# Altium PCB EMGnew.PcbDoc
Units mm, origin at the board's own origin, x right, y up, seen from the top; angles counter-clockwise.
Board outline 60.25 x 62 mm, 2 copper layers (Top Layer, Bottom Layer), stack 1.6 mm thick; 30 components, 19 nets, 123 pads, 11 vias.
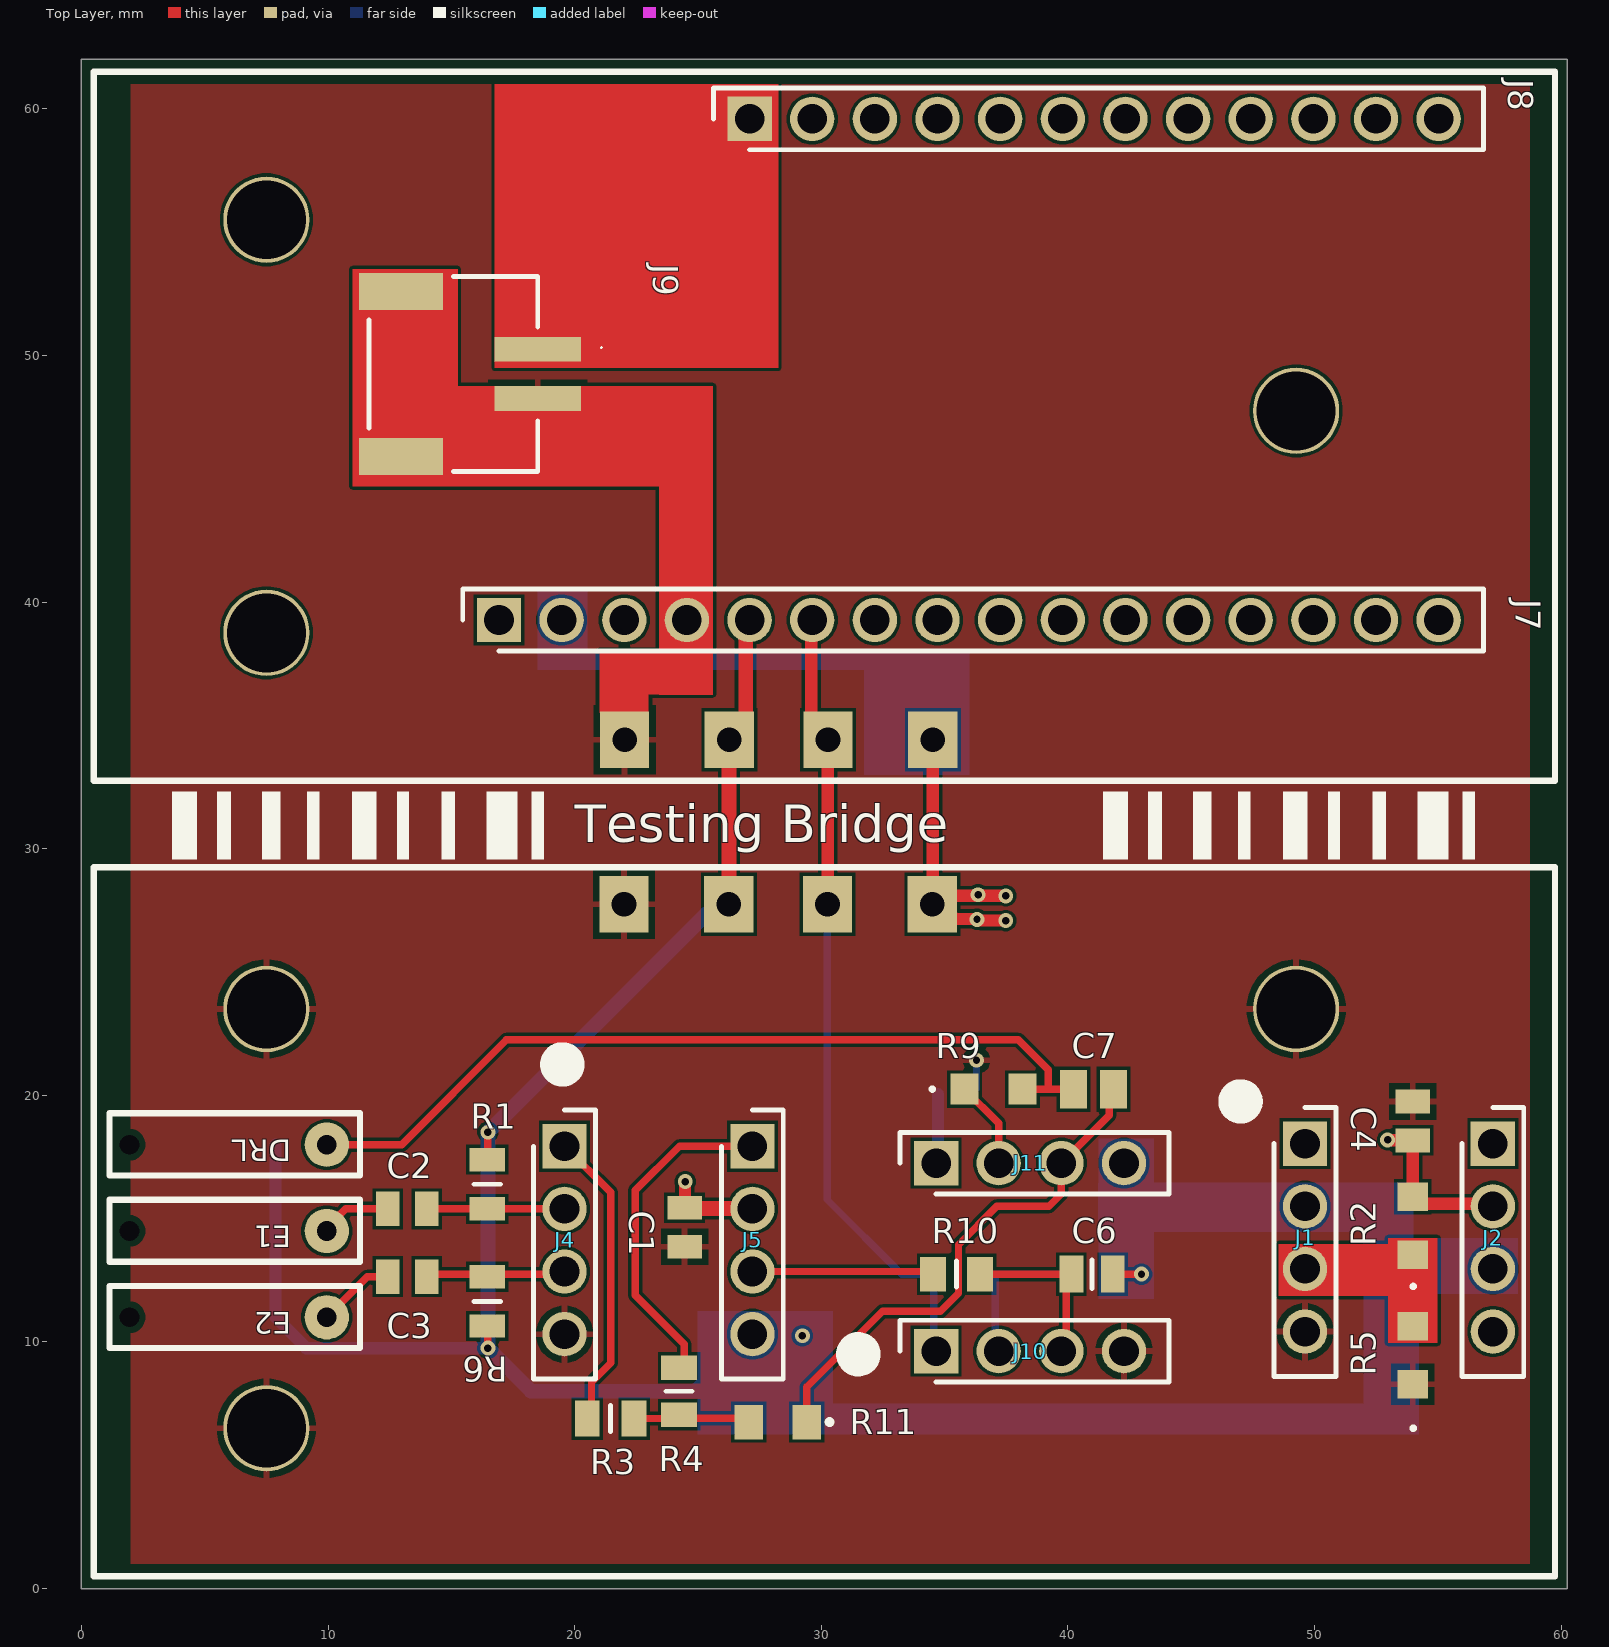
[diagram p0: Top Layer view]
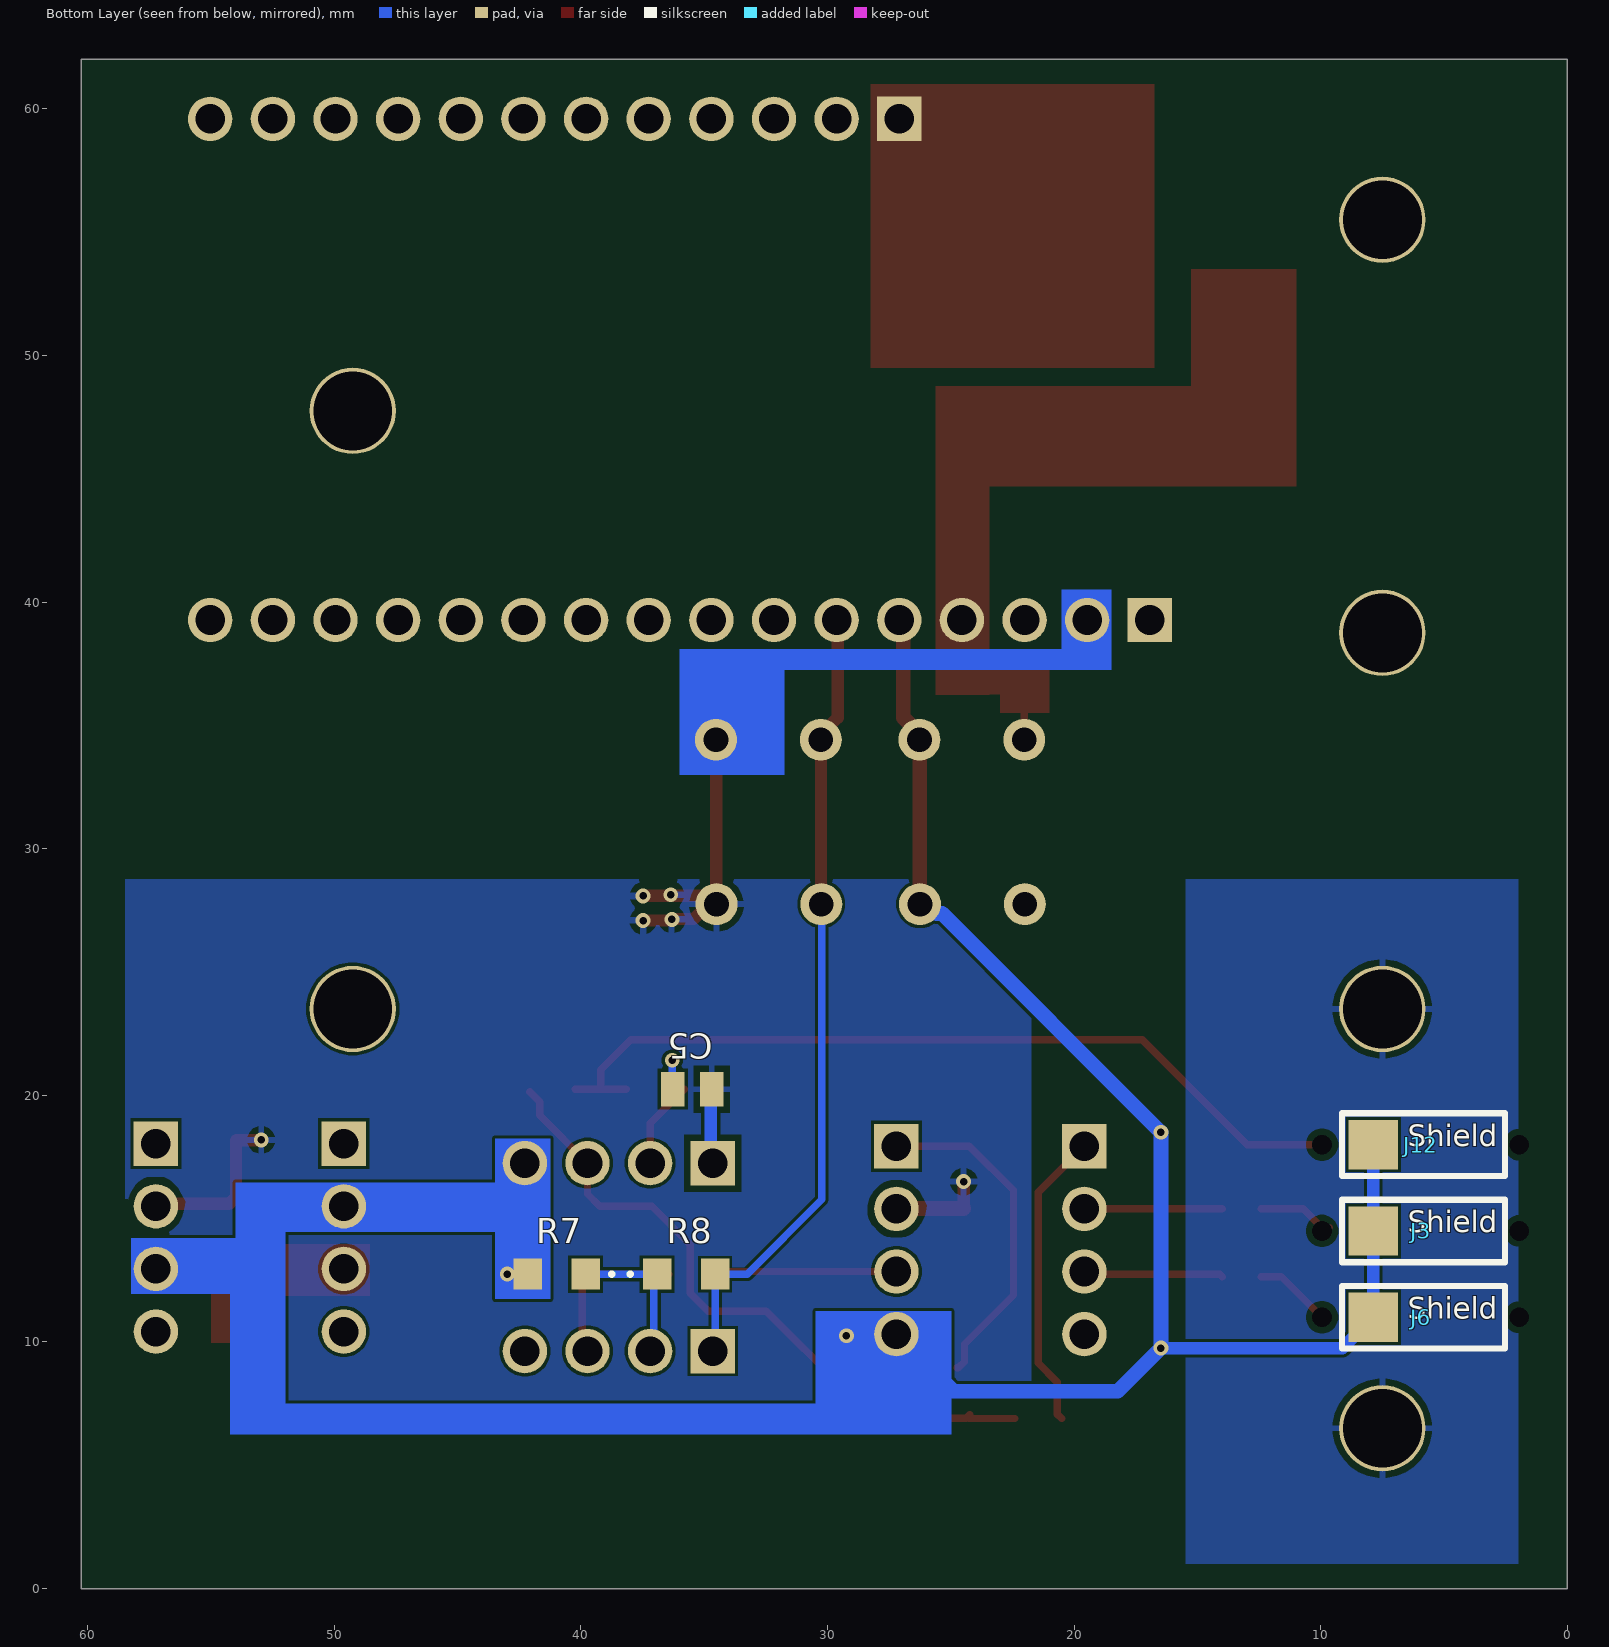
[diagram p1: Bottom Layer view, seen from below]
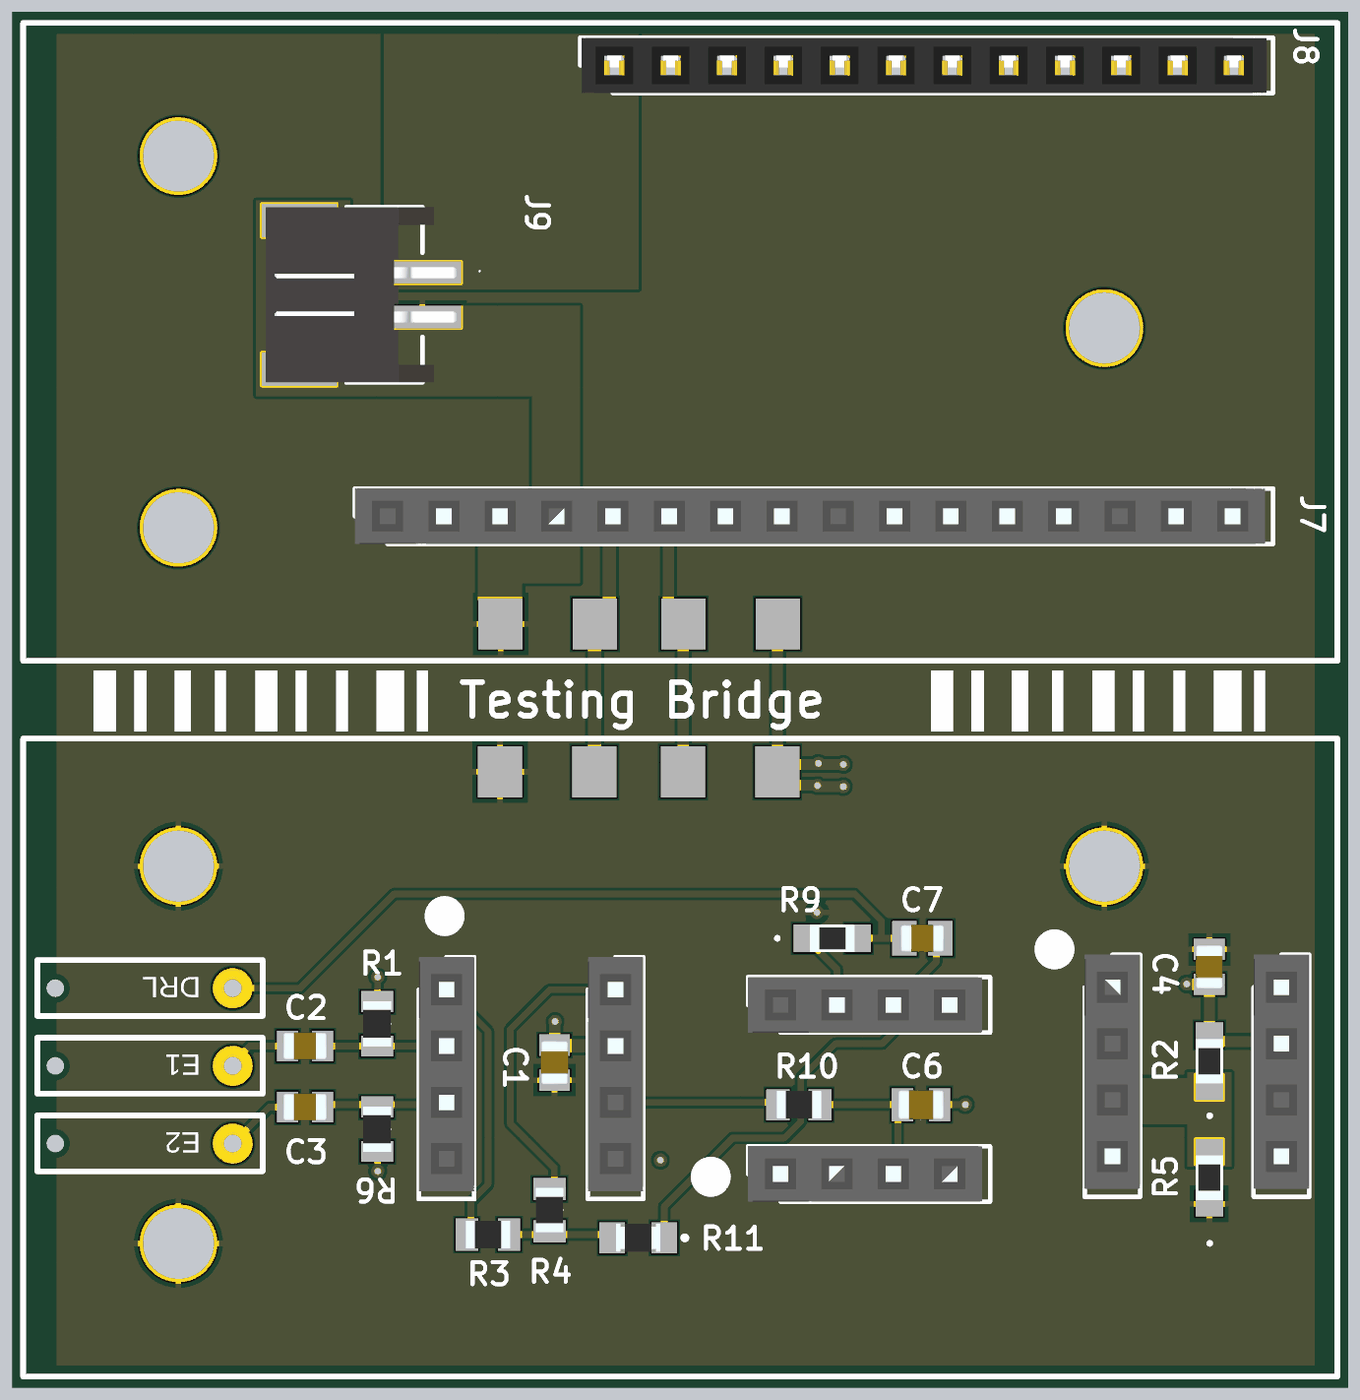
[diagram p2: 3D render of the assembled board from above, using the file's embedded part models]
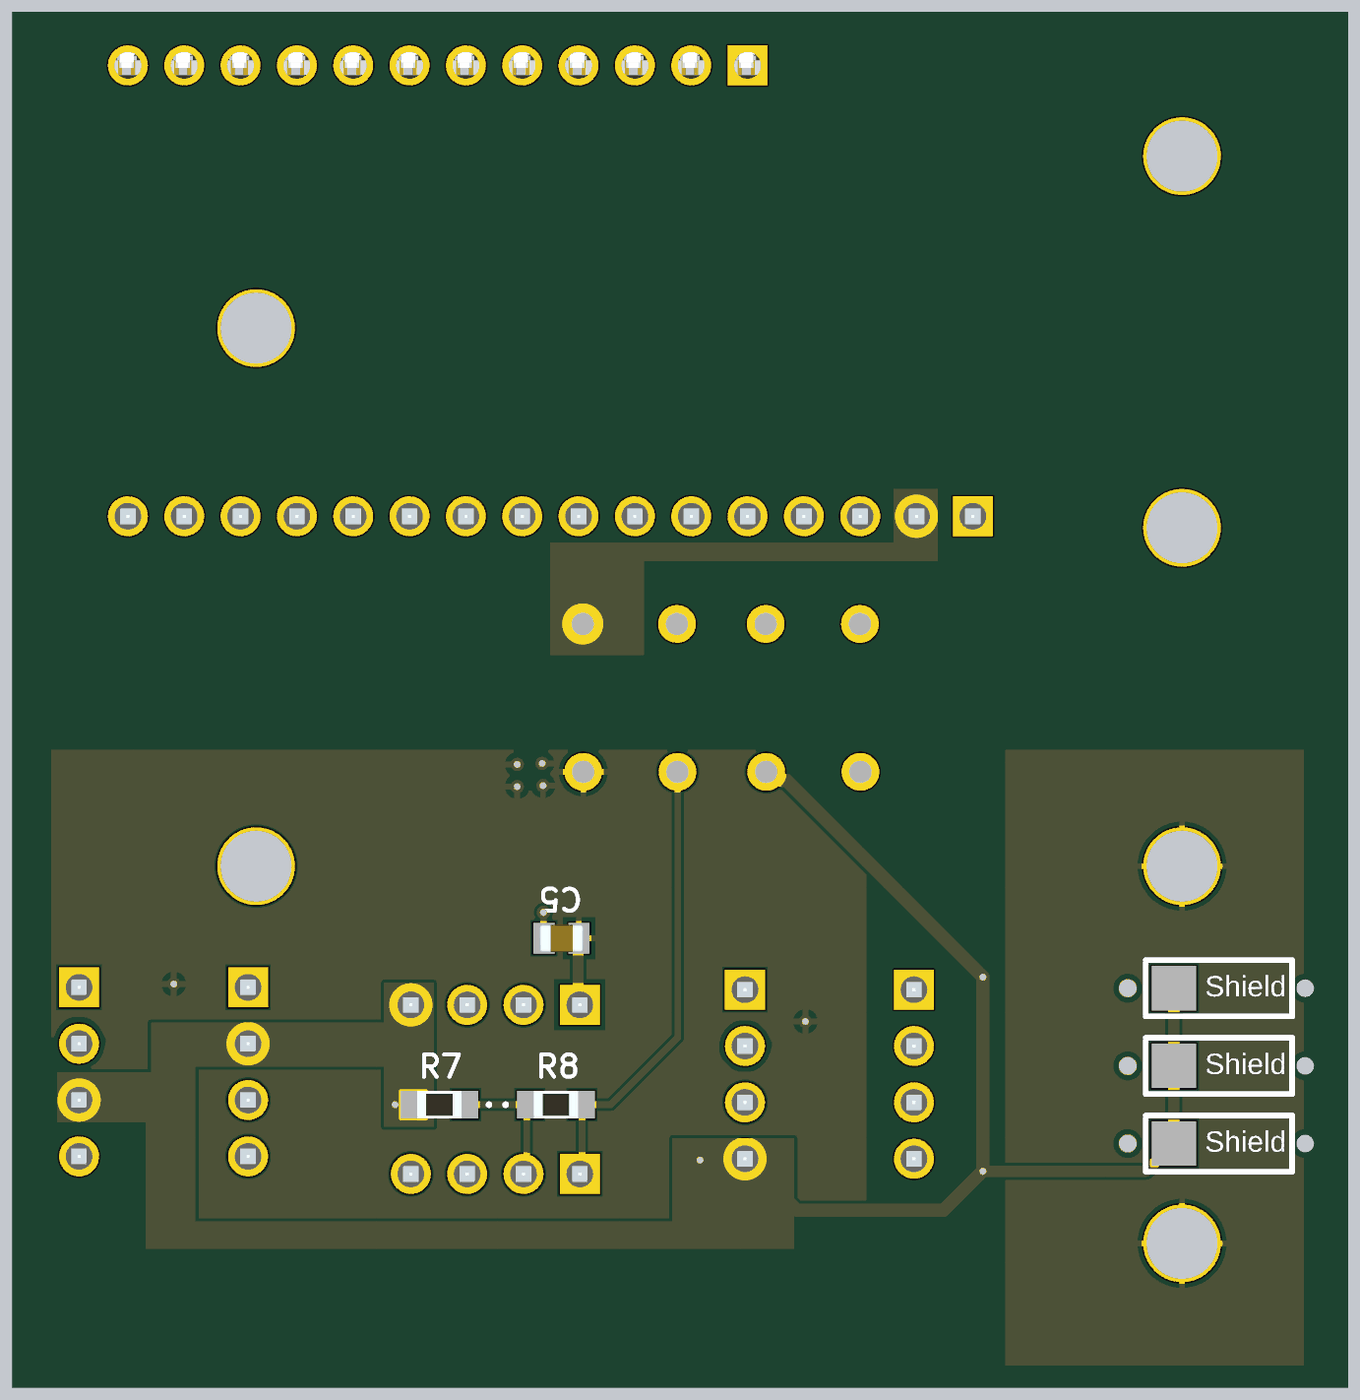
[diagram p3: 3D render of the assembled board from below, using the file's embedded part models]

## Layer stack, top to bottom
Top Solder: solder mask 0.0203, Solder Resist, Dk 3.5
Top Layer: signal copper 0.0508
Dielectric 1: dielectric 1.4986, FR-4, Dk 4.8
Bottom Layer: signal copper 0.0508
Bottom Solder: solder mask 0.0203, Solder Resist, Dk 3.5

## Board outline
0,0 0,62 60.25,62 60.25,0

## Design rules (kind name [scope] priority, off if disabled: settings)
BoardOutlineClearance [All] p1: gap=0.2 ignorepadtopadclearanceinfootprint=FALSE
Clearance [All] p1: gap=0.127 ignorepadtopadclearanceinfootprint=FALSE except(0.25: Arc-Hole Track-Hole SMDPad-Hole THPad-Hole Via-Hole Fill-Hole Poly-Hole Region-Hole Text-Hole)
ComponentClearance [All] p1: gap=0.127 collisioncheckmode=3 verticalgap=0.127 showdistances=TRUE
DiffPairsRouting [All] p1: maxlimit=0.254 minlimit=0.127 mostfreqgap=0.127 toplayer_minwidth=0.127 toplayer_maxwidth=25.4 toplayer_prefwidth=0.127 bottomlayer_minwidth=0.127 bottomlayer_maxwidth=25.4 bottomlayer_prefwidth=0.127 maxuncoupledlength=12.7
Height [All] p1: minheight=0 maxheight=1816.048 prefheight=12.7
HoleSize [All] p1: absolutevalues=TRUE maxlimit=6.3 minlimit=0.3 maxpercent=80.000 minpercent=20.000
HoleToHoleClearance [All] p1: gap=0.25 allowstackedmicrovias=FALSE
MinimumAnnularRing [All] p1: minimumring=0.076
MinimumSolderMaskSliver [All] p1: minsoldermaskwidth=0
PlaneClearance [All] p1: clearance=0.127
PlaneConnect PlaneConnectPowerPads [InPadClass('PowerPads')] p1: planeconnectstyle=Direct reliefexpansion=0.508 reliefentries=4 reliefconductorwidth=0.254 reliefairgap=0.254
PlaneConnect [All] p2: pad.planeconnectstyle=Relief pad.reliefexpansion=0.3 pad.reliefentries=4 pad.reliefconductorwidth=0.127 pad.reliefairgap=0.127 via.planeconnectstyle=Direct via.reliefexpansion=0.3 via.reliefentries=4 via.reliefconductorwidth=0.127 via.reliefairgap=0.127
PolygonConnect PolygonConnect_4 [All vs IsNamedPolygon('NONET_L-01_P-001')] p1: connectstyle=Relief reliefconductorwidth=0.254 reliefentries=4 polygonreliefangle="90 Angle" airgapwidth=0.254
PolygonConnect PolygonConnect_3 [All vs IsNamedPolygon('NONET_L-01_P-001')] p2: thpad.connectstyle=NoConnect thpad.reliefconductorwidth=0.254 thpad.reliefentries=4 thpad.polygonreliefangle="90 Angle" thpad.airgapwidth=0.254 smdpad.connectstyle=Relief smdpad.reliefconductorwidth=0.254 smdpad.reliefentries=4 smdpad.polygonreliefangle="90 Angle" smdpad.airgapwidth=0.254 via.connectstyle=Relief via.reliefconductorwidth=0.254 via.reliefentries=4 via.polygonreliefangle="90 Angle" via.airgapwidth=0.254
PolygonConnect PolygonConnect_2 [All vs IsNamedPolygon('NONET_L-01_P-001')] p3: connectstyle=Relief reliefconductorwidth=0.254 reliefentries=4 polygonreliefangle="90 Angle" airgapwidth=0.254
PolygonConnect PolygonConnect_1 [All vs IsNamedPolygon('NONET_L-01_P-001')] p4: thpad.connectstyle=NoConnect thpad.reliefconductorwidth=0.254 thpad.reliefentries=4 thpad.polygonreliefangle="90 Angle" thpad.airgapwidth=0.254 smdpad.connectstyle=Relief smdpad.reliefconductorwidth=0.254 smdpad.reliefentries=4 smdpad.polygonreliefangle="90 Angle" smdpad.airgapwidth=0.254 via.connectstyle=Relief via.reliefconductorwidth=0.3 via.reliefentries=4 via.polygonreliefangle="90 Angle" via.airgapwidth=0.254
PolygonConnect PolygonConnectPowerPads [All vs (InPadClass('PowerPads'))] p5: connectstyle=Direct reliefconductorwidth=0.254 reliefentries=4 polygonreliefangle="90 Angle" airgapwidth=0.254
PolygonConnect [All] p6: thpad.connectstyle=Relief thpad.reliefconductorwidth=0.127 thpad.reliefentries=4 thpad.polygonreliefangle="90 Angle" thpad.airgapwidth=0.127 smdpad.connectstyle=Relief smdpad.reliefconductorwidth=0.127 smdpad.reliefentries=4 smdpad.polygonreliefangle="90 Angle" smdpad.airgapwidth=0.127 via.connectstyle=Direct via.reliefconductorwidth=0.127 via.reliefentries=4 via.polygonreliefangle="90 Angle" via.airgapwidth=0.127
RoutingVias [All] p1: holewidth=0.3 width=0.6 viastyle="Through Hole" minholewidth=0.3 minwidth=0.6 maxholewidth=0.6 maxwidth=6.6
SilkToSilkClearance [All] p1: silktosilkclearance=0
SilkToSolderMaskClearance [IsPad] p1: minsilkscreentomaskgap=0.127 clearancetoexposedcopper=TRUE
SolderMaskExpansion [All] p1: expansion=0.075 istentingtop=FALSE
SupplyNets "Schematic Supply Nets_2" [InNet('SGND')] p1: voltage=0.000
SupplyNets "Schematic Supply Nets_1" [InNet('GND')] p2: voltage=0.000
SupplyNets "Schematic Supply Nets" [InNet('3V3')] p3: voltage=0.000
Width [All] p1: maxlimit=25.4 minlimit=0.127 preferedwidth=0.127 minimp=50.000000 maximp=50.000000 favimp=50.000000
20 further rules are at their usual default settings.

## Components (designator, comment, footprint, x,y, rotation, side; value= is the part's Value field where it differs from the comment)
C1 "10u" CAPC2012X135N 24.457,14.644 r270 top
C2 "10u" CAPC2012X135N 13.207,15.394 r0 top
C3 "10u" CAPC2012X135N 13.207,12.644 r0 top
C4 "10u" CAPC2012X135N 53.982,18.959 r90 top
C5 "10u" CAPC2012X135N 35.482,20.249 r0 bottom
C6 "4.7u" CAPC2114X145N 40.982,12.749 r0 top
C7 "1nF" CAPC2012X140N 41.042,20.249 r180 top
J1 "M20-7820446" RHDR4W70P0X254_1X4_1056X250X865P 49.612,18.039 r270 top
J2 "M20-7820446" RHDR4W70P0X254_1X4_1056X250X865P 57.232,18.039 r270 top
J3 "shielded_connector" coaxial_connector 7.232,14.499 r180 top
J4 "M20-7820446" RHDR4W70P0X254_1X4_1056X250X865P 19.587,17.934 r270 top
J5 "M20-7820446" RHDR4W70P0X254_1X4_1056X250X865P 27.207,17.934 r270 top
J6 "shielded_connector" coaxial_connector 7.232,10.999 r180 top
J7 "M20-7821642" RHDR16W70P0X254_1X16_4104X250X865P 16.93,39.27 r0 top
J8 "M20-7821242" RHDR12W70P0X254_1X12_3088X250X865P 27.09,59.59 r0 top
J9 "1769" 1769 18.5,49.25 r270 top
J10 "M20-7820446" RHDR4W70P0X254_1X4_1056X250X865P 34.652,9.629 r0 top
J11 "M20-7820446" RHDR4W70P0X254_1X4_1056X250X865P 34.652,17.249 r0 top
J12 "shielded_connector" coaxial_connector 7.232,17.999 r180 top
R1 "15K" RESC2013X84N 16.457,16.394 r90 top
R2 "1M" ERJUP6 53.982,14.709 r90 top
R3 "1K" RESC2012X60N 21.457,6.894 r0 top
R4 "1K" RESC2012X60N 24.232,7.999 r90 top
R5 "1M" ERJUP6 53.982,9.459 r90 top
R6 "15K" RESC2013X84N 16.457,11.644 r90 top
R7 "4.3K" ERJUP6 40.982,12.749 r0 bottom
R8 "10K" ERJUP6 35.732,12.749 r180 bottom
R9 "100K" ERJUP6 36.982,20.249 r0 top
R10 "100R" RESC2012X70N 35.482,12.749 r0 top
R11 "15K" ERJP06D1000V 28.232,6.749 r180 top

## Footprints (in the part's own frame and the unit in brackets; to place one, negate y for a bottom-side part, rotate by r counter-clockwise, add the part's x,y. Pads: shape width x height; smd on the part's side, far side on the other; paste and mask are expansions set on the pad)
1769 [mm]
  rect 1x3.5 smd: 1(-1,0) 2(1,0)
  rect 1.5x3.4 smd: 3(-3.35,-5.55) 4(3.35,-5.55)
  silkscreen extent -3.95,-6.85 3.95,2.61, body extent -3.95,-7.07 3.95,1.53, height 4.8
CAPC2012X135N [mm]
  rect 0.96x1.39 smd: 1(-0.79,0) 2(0.79,0)
  body extent -1,-0.63 1,0.63, height 1.35
CAPC2012X140N [mm]
  rect 1.1x1.57 smd: 1(-0.81,0) 2(0.81,0)
  body extent -1,-0.63 1,0.63, height 1.4
CAPC2114X145N [mm]
  rect 0.96x1.49 smd: 1(-0.84,0) 2(0.84,0)
  silkscreen extent 0,-0.58 0,0.58, body extent -1.05,-0.67 1.05,0.67, height 1.45
coaxial_connector [mm]
  round 1.8 / inner round 2 / far side round 0 hole 0.8: 1(-2.715,0)
  rect 2x2 smd far side: 2(-0.635,0)
  round 0.475 hole 0.8 unplated: 3(5.285,0)
  silkscreen extent -4.06,-1.27 6.1,1.25
ERJP06D1000V [mm]
  rect 1.15x1.4 smd: 1(-1.175,0) 2(1.175,0)
  silkscreen extent -2.2,-0.1 -2,0.1, body extent -1,-0.63 1,0.63, height 0.6
ERJUP6 [mm]
  rect 1.15x1.25 smd: 1(-1.175,0) 2(1.175,0)
  silkscreen extent -2.51,-0.07 -2.41,0.03, body extent -1,-0.63 1,0.63, height 0.6
RESC2012X60N [mm]
  rect 1x1.45 smd: 1(-0.95,0) 2(0.95,0)
  silkscreen extent 0,-0.53 0,0.53, body extent -1,-0.63 1,0.63, height 0.6
RESC2012X70N [mm]
  rect 1.05x1.4 smd: 1(-0.95,0) 2(0.95,0)
  silkscreen extent 0,-0.53 0,0.53, body extent -1,-0.63 1,0.63, height 0.6
RESC2013X84N [mm]
  rect 0.95x1.45 smd: 1(-1,0) 2(1,0)
  silkscreen extent 0,-0.54 0,0.54, body extent -1.02,-0.64 1.02,0.64, height 0.84
RHDR4W70P0X254_1X4_1056X250X865P [mm]
  rect 1.8x1.8 hole 1.2: 1(0,0)
  round 1.8 hole 1.2: 2(2.54,0) 3(5.08,0) 4(7.62,0)
  silkscreen extent -1.47,-1.25 9.44,1.25, body extent -1.47,-1.25 9.09,1.25, height 8.65
RHDR12W70P0X254_1X12_3088X250X865P [mm]
  rect 1.8x1.8 hole 1.2: 1(0,0)
  round 1.8 hole 1.2: 2(2.54,0) 3(5.08,0) 4(7.62,0) 5(10.16,0) 6(12.7,0) 7(15.24,0) 8(17.78,0) 9(20.32,0) 10(22.86,0) 11(25.4,0) 12(27.94,0)
  silkscreen extent -1.47,-1.25 29.76,1.25, body extent -1.41,-1.25 29.47,1.25, height 8.5
RHDR16W70P0X254_1X16_4104X250X865P [mm]
  rect 1.8x1.8 hole 1.2: 1(0,0)
  round 1.8 hole 1.2: 2(2.54,0) 3(5.08,0) 4(7.62,0) 5(10.16,0) 6(12.7,0) 7(15.24,0) 8(17.78,0) 9(20.32,0) 10(22.86,0) 11(25.4,0) 12(27.94,0) 13(30.48,0) 14(33.02,0) 15(35.56,0) 16(38.1,0)
  silkscreen extent -1.47,-1.25 39.92,1.25, body extent -1.47,-1.25 39.57,1.25, height 8.65

## Part data
C1 C2 C3 C4 C5: library part EMK212BB7106KG-T, "Capacitor", Manufacturer_Name="TAIYO YUDEN", Mouser Part Number=963-EMK212BB7106KG-T, Datasheet Link=https://www.mouser.com/ds/2/396/mlcc11_hq_e-541564.pdf, Height=1.35mm, Manufacturer_Part_Number=EMK212BB7106KG-T, Mouser Price/Stock=https://www.mouser.co.uk/ProductDetail/TAIYO-YUDEN/EMK212BB7106KG-T?qs=vF%252B8ahGVilemLVRka0hELA%3D%3D
C6: library part MCASE21GBC7475KTCA01, "Capacitor", Manufacturer_Name="TAIYO YUDEN", Datasheet Link=https://www.mouser.com/datasheet/2/396/TAIYO_YUDEN_03_04_2025_MCASE21GBC7475KTCA01_SS-3571538.pdf, Height=1.45mm, Manufacturer_Part_Number=MCASE21GBC7475KTCA01
C7: library part C0805X102MBRAC3316, "Capacitor", Manufacturer_Name=KEMET, Mouser Part Number=80-C0805X102MBR3316, Datasheet Link=https://search.kemet.com/component-documentation/download/specsheet/C0805X102MBRAC3316, Height=1.4mm, Manufacturer_Part_Number=C0805X102MBRAC3316, Mouser Price/Stock=https://www.mouser.co.uk/ProductDetail/KEMET/C0805X102MBRAC3316?qs=1Kr7Jg1SGW%252B2hGpng33iKA%3D%3D
J1 J2 J4 J5 J10 J11: "Connector", Manufacturer_Name=Harwin, Mouser Part Number=855-M20-7820446, Datasheet Link=https://cdn.harwin.com/pdfs/M20-782.pdf, Height=8.65mm, Manufacturer_Part_Number=M20-7820446, Mouser Price/Stock=https://www.mouser.co.uk/ProductDetail/Harwin/M20-7820446?qs=vF78I%252BjhbY8%252Bno0H8mp9XA%3D%3D
J7: "Connector", Manufacturer_Name=Harwin, Mouser Part Number=855-M20-7821642, Datasheet Link=https://cdn.harwin.com/pdfs/M20-782.pdf, Height=8.65mm, Manufacturer_Part_Number=M20-7821642, Mouser Price/Stock=https://www.mouser.co.uk/ProductDetail/Harwin/M20-7821642?qs=ulE8k0yEMYYHOwsI6S7TGA%3D%3D
J8: "Connector", Manufacturer_Name=Harwin, Mouser Part Number=855-M20-7821242, Datasheet Link=https://cdn.harwin.com/pdfs/M20-782.pdf, Height=8.65mm, Manufacturer_Part_Number=M20-7821242, Mouser Price/Stock=https://www.mouser.co.uk/ProductDetail/Harwin/M20-7821242?qs=ulE8k0yEMYZ9a6Cl8vr1ng%3D%3D
J9: "Connector", Manufacturer_Name=Adafruit, Mouser Part Number=485-1769, Arrow Part Number=1769, Arrow Price/Stock=https://www.arrow.com/en/products/1769/adafruit-industries?utm_currency=USD&region=nac, Datasheet Link=https://cdn-shop.adafruit.com/datasheets/17311.pdf, Height=5.5mm, Manufacturer_Part_Number=1769, Mouser Price/Stock=https://www.mouser.co.uk/ProductDetail/Adafruit/1769?qs=GURawfaeGuBbgoGtf2XstA%3D%3D
R1 R6: library part PLTT0805Z1502QGT5, "Resistor", Manufacturer_Name=Vishay, Mouser Part Number=71-PLTT0805Z1502QGT5, Datasheet Link=https://www.vishay.com/docs/60082/pltt.pdf, Height=0.838mm, Manufacturer_Part_Number=PLTT0805Z1502QGT5, Mouser Price/Stock=https://www.mouser.co.uk/ProductDetail/Vishay-Thin-Film/PLTT0805Z1502QGT5?qs=QmnkJ35t3fjZaQs5uMld%252Bg%3D%3D
R2 R5: library part ERJ-UP6D1004V, "Resistor", Manufacturer_Name=Panasonic, Datasheet Link=https://industrial.panasonic.com/cdbs/www-data/pdf/RDP0000/AOA0000C337.pdf, Height=0.7mm, Manufacturer_Part_Number=ERJ-UP6D1004V
R3 R4: library part CRCW08051K00FKTAHP, "Resistor", Manufacturer_Name=Vishay, Datasheet Link=https://componentsearchengine.com/Datasheets/1/CRCW08051R00FKEAHP.pdf, Height=0.6mm, Manufacturer_Part_Number=CRCW08051K00FKTAHP
R7: library part ERJ-UP6D4301V, "Resistor", Manufacturer_Name=Panasonic, Mouser Part Number=667-ERJ-UP6D4301V, Arrow Part Number=ERJ-UP6D4301V, Arrow Price/Stock=https://www.arrow.com/en/products/erj-up6d4301v/panasonic?region=nac, Datasheet Link=https://industrial.panasonic.com/cdbs/www-data/pdf/RDP0000/AOA0000C337.pdf, Height=0.7mm, Manufacturer_Part_Number=ERJ-UP6D4301V, Mouser Price/Stock=https://www.mouser.co.uk/ProductDetail/Panasonic/ERJ-UP6D4301V?qs=ZcfC38r4PouG4jhBxte63A%3D%3D
R8: library part ERJ-UP6D1002V, "Resistor", Manufacturer_Name=Panasonic, Datasheet Link=https://industrial.panasonic.com/cdbs/www-data/pdf/RDP0000/AOA0000C337.pdf, Height=0.7mm, Manufacturer_Part_Number=ERJ-UP6D1002V
R9: library part ERJ-UP6D1003V, "Resistor", Manufacturer_Name=Panasonic, Datasheet Link=https://industrial.panasonic.com/cdbs/www-data/pdf/RDP0000/AOA0000C337.pdf, Height=0.7mm, Manufacturer_Part_Number=ERJ-UP6D1003V
R10: library part ERJ-S06J101V, "Resistor", Manufacturer_Name=Panasonic, Mouser Part Number=667-ERJ-S06J101V, Datasheet Link=https://industrial.panasonic.com/cdbs/www-data/pdf/RDP0000/AOA0000C334.pdf, Height=0.7mm, Manufacturer_Part_Number=ERJ-S06J101V, Mouser Price/Stock=https://www.mouser.co.uk/ProductDetail/Panasonic/ERJ-S06J101V?qs=Zyl8A9hlmJqshrwxn1wW6g%3D%3D
R11: library part ERJ-P06D1502V, "Resistor", Manufacturer_Name=Panasonic, Mouser Part Number=667-ERJ-P06D1502V, Datasheet Link=http://industrial.panasonic.com/cdbs/www-data/pdf/RDA0000/AOA0000C102.pdf, Height=0.7mm, Manufacturer_Part_Number=ERJ-P06D1502V, Mouser Price/Stock=https://www.mouser.com/Search/Refine.aspx?Keyword=667-ERJ-P06D1502V

## Free pads (board coordinates)
  round 3.5 hole 3.2: 4(7.5,6.5) 4(7.5,23.5) 4(7.5,38.75) 4(7.5,55.5) 4(49.25,23.5) 4(49.25,47.75)
  round 1.7 hole 1: 5(22,27.75) 5(22.022,34.415) 5(26.25,27.75) 5(26.272,34.415) 5(30.25,27.75) 5(30.272,34.415) 5(34.5,27.75) 5(34.522,34.415)
  rect 2x2.3 smd: 6(22,27.75) 6(22.022,34.415) 6(26.25,27.75) 6(26.272,34.415) 6(30.25,27.75) 6(30.272,34.415) 6(34.5,27.75) 6(34.522,34.415)

## Via types
v1: diameter 0.6, hole 0.3, Top Layer to Bottom Layer, tented both sides, 11 vias

## Nets (pads, with @x,y where several pads share a name; then routed paths per layer and width w, separated by ;. In a path a pad name is that pad's centre, name@x,y a point inside that pad or via, vN(x,y) a via of type N, cw(c..) or ccw(c..) an arc to the next point about the centre after c; other vN are vias at no path point)
3V3: C1.1 C4.1 C5.1 J2.2 J5.2 J7.2 J11.1 pad.5@34.5,27.75 pad.5@34.522,34.415 pad.6@34.5,27.75 pad.6@34.522,34.415 R2.2 | length 26.8
  Top Layer w0.5: C1.1@24.477,15.414 24.469,15.421 24.469,16.486 v1(24.482,16.499) ; J5.2@27.187,15.414 J5.2 ; pad.6@34.522,34.415 34.511,34.404 34.511,27.761 pad.6@34.5,27.75 ; v1(37.478,27.085) 36.428,27.085 36.401,27.112 36.33,27.112 36.292,27.15 35.425,27.15 34.825,27.75 pad.6@34.5,27.75 ; v1(37.478,28.085) 34.5,28.085 pad.6@34.5,27.75 ; v1(52.961,18.189) 52.972,18.179 53.972,18.179 C4.1 R2.2 54.27,15.596 57.135,15.596 J2.2
  Top Layer w0.6: C1.1@24.477,15.414 J5.2@27.187,15.414
  Bottom Layer w0.5: J11.1@34.732,17.053 C5.1@34.732,20.053
  other v1: 36.311,27.131 36.355,28.132
A1: J7.6 J10.1 pad.5@30.25,27.75 pad.5@30.272,34.415 pad.6@30.25,27.75 pad.6@30.272,34.415 R8.2 | length 32.6
  Top Layer w0.5: J7.6 29.591,39.231 29.591,35.308 30.272,34.627 30.272,34.415 30.261,34.404 30.261,27.761 pad.6@30.25,27.75
  Bottom Layer w0.3: pad.5@30.25,27.75 30.232,27.75 30.232,15.773 33.256,12.749 R8.2 34.557,9.724 J10.1
BAT: J8.1 J9.1
DRL_sense: R3.2 R4.1 R11.2 | length 4.8
  Top Layer w0.3: R3.2 R4.1@24.257,6.894 ; R4.1 24.382,6.899 26.907,6.899 R11.2
GND: C1.2 C4.2 C5.2 J1.4 J4.4 J7.4 J9.2 J9.3 J9.4 J10.4 pad.4@7.5,6.5 pad.4@7.5,23.5 pad.4@49.25,23.5 pad.5@22,27.75 pad.5@22.022,34.415 pad.6@22,27.75 pad.6@22.022,34.415 R5.1 | length 3.5
  Top Layer w0.3: pad.6@22,27.75 pad.6@22.011,27.761 ; pad.6@22.011,34.404 22.022,34.415 22.022,36.742
  Bottom Layer w0.3: C5.2 36.291,20.268 v1(36.291,21.418)
INA_out: J5.3 R10.1 | length 7.4
  Top Layer w0.3: J5.3 34.427,12.854 R10.1
NetC2_1: C2.1 J3.1 | length 3.1
  Top Layer w0.3: J3.1@9.661,14.638 9.957,14.638 10.713,15.394 C2.1
NetC2_2: C2.2 J4.2 R1.1 | length 5.6
  Top Layer w0.3: C2.2 J4.2
NetC3_1: C3.1 J6.1 | length 3.2
  Top Layer w0.3: J6.1 11.592,12.644 C3.1
NetC3_2: C3.2 J4.3 R6.2 | length 5.7
  Top Layer w0.3: C3.2 14.102,12.749 19.482,12.749 J4.3
NetC6_1: C6.1 J10.3 R10.2 | length 7
  Top Layer w0.3: R10.2 C6.1 39.937,12.544 39.937,9.834 J10.3
NetC7_1: C7.1 J11.3 R11.1 | length 21.3
  Top Layer w0.3: R11.1 29.407,8.174 32.482,11.249 34.832,11.249 35.562,11.979 35.562,13.944 37.117,15.499 39.232,15.499 39.732,15.999 J11.3 41.673,19.19 41.673,19.736 C7.1@42.081,20.144
NetC7_2: C7.2 J12.1 R9.2 | length 34.4
  Top Layer w0.3: J12.1 12.982,17.999 17.232,22.249 37.982,22.249 39.194,21.036 39.194,20.249 ; R9.2 39.194,20.249 ; C7.2 39.194,20.249
NetJ1_3: J1.3 R2.1 R5.2 | length 2.9
  Top Layer w0.381: R5.2 R2.1
NetJ4_1: J4.1 R3.1 | length 12.2
  Top Layer w0.3: J4.1 21.457,16.064 21.457,9.144 20.682,8.369 20.682,7.069 R3.1
NetJ5_1: J5.1 R4.2 | length 13.7
  Top Layer w0.3: R4.2@24.732,8.949 24.695,8.949 24.445,9.199 24.445,9.906 22.457,11.894 22.457,16.144 24.247,17.934 J5.1
NetJ10_2: J10.2 R7.1 R8.1 | length 6.1
  Bottom Layer w0.3: J10.2 37.049,9.771 37.049,12.606 R8.1 R7.1
NetJ11_2: J11.2 R9.1 | length 4
  Top Layer w0.3: R9.1 37.192,18.864 J11.2@37.192,16.819
SGND: C6.2 J1.2 J2.3 J3.2 J5.4 J6.2 J7.5 J11.4 J12.2 pad.5@26.25,27.75 pad.5@26.272,34.415 pad.6@26.25,27.75 pad.6@26.272,34.415 R1.2 R6.1 R7.2 | length 65.9
  Top Layer w0.3: R6.1 16.482,10.619 v1(16.482,9.749) ; R1.2 16.482,17.419 v1(16.482,18.499) ; C6.2 v1(42.982,12.749)
  Top Layer w0.6: pad.6@26.25,27.75 26.261,27.761 26.261,34.404 26.272,34.415 26.272,34.658 26.932,35.317 26.932,39.112 J7.5
  Bottom Layer w0.5: J12.2 J3.2 J6.2 9.117,9.749 v1(16.482,9.749)
  Bottom Layer w0.6: pad.5@26.25,27.75 25.952,27.75 25.573,27.371 25.354,27.371 v1(16.482,18.499) v1(16.482,9.749) 18.232,7.999 24.892,7.999 J5.4
  other v1: 29.232,10.249
pads on no net: J1.1 J2.1 J2.4 J3.3 J6.3 J7.1 J7.3 J7.7 J7.8 J7.9 J7.10 J7.11 J7.12 J7.13 J7.14 J7.15 J7.16 J8.2 J8.3 J8.4 J8.5 J8.6 J8.7 J8.8 J8.9 J8.10 J8.11 J8.12 J12.3

## Polygon pours and split planes (outlines as drawn)
GND on Bottom Layer "NONET_L-01_P-001" (solid, pour order 3): 2,28.75 15.482,28.75 15.482,1 2,1
3V3 on Bottom Layer "NONET_L-01_P-001" (solid, remove dead copper, pour order 0): 21.732,28.75 21.732,1 58.482,1 58.482,28.75
GND on Top Layer "NONET_L-01_P-001" (solid, pour order 1): 2,61 2,1 58.732,1 58.732,61

## Other copper
Top Layer:
  rectangle net GND: 21,35.5 23,37.5
  rectangle net GND: 21,36.25 24.517,38
  region net GND: 11,53.5 11,44.687 23.432,44.687 23.432,36.25 25.603,36.25 25.603,48.75 15.25,48.75 15.25,53.5
  region net BAT: 16.75,49.5 28.25,49.5 28.25,61 16.75,61
  region net NetJ1_3: 54.982,9.959 54.982,14.209 52.982,14.209 52.982,9.959
  region net NetJ1_3: 48.556,13.959 53.732,13.959 53.732,11.875 48.556,11.875
Bottom Layer:
  rectangle net SGND: 26.232,9.249 30.482,11.249
  rectangle net SGND: 24.982,6.249 30.482,11.249
  rectangle net SGND: 28.982,6.249 52.982,7.499
  rectangle net SGND: 51.982,6.249 54.232,12.249
  rectangle net SGND: 41.232,11.749 43.482,18.249
  region net 3V3: 18.5,40.5 18.5,37.25 31.75,37.25 31.75,33 36,33 36,38.093 20.5,38.093 20.5,40.5
  pour cut-out: 56.174,15.991 56.024,15.695 ccw(c57.578,15.782) 56.541,14.622 ccw(c57.097,15.179) 57.097,14.392 57.401,14.392 ccw(c57.401,15.179) 57.958,14.622 58.173,14.837 ccw(c57.616,15.394) 58.403,15.394 ccw(c56.883,15.394) 57.958,16.469 ccw(c57.401,15.913) 57.401,16.7 57.122,16.7 ccw(c57.122,15.852) 56.523,16.452 56.326,16.254
  pour cut-out: 26.131,15.839 25.982,15.544 ccw(c27.535,15.63) 26.498,14.471 ccw(c27.055,15.027) 27.055,14.24 27.359,14.24 ccw(c27.359,15.027) 27.915,14.471 28.13,14.685 ccw(c27.574,15.242) 28.361,15.242 ccw(c26.84,15.242) 27.915,16.317 ccw(c27.359,15.761) 27.359,16.548 27.08,16.548 ccw(c27.08,15.701) 26.481,16.3 26.283,16.103
  region net SGND: 58.232,11.959 58.232,14.209 53.994,14.209 53.994,16.459 41.232,16.459 41.232,14.459 51.982,14.459 51.982,11.959
  pour cut-out: 33.498,18.403 33.498,16.095 35.806,16.095 35.806,18.396 35.232,18.396 35.232,16.999 33.982,16.999 33.982,18.403

## Silkscreen, mask and mechanical layers (free items; w line width, h text height)
Top Overlay:
  circle w1: c19.5,21.25 r0.4
  circle w1: c31.5,9.5 r0.4
  circle w1: c47,19.75 r0.4
  rectangle: 3.679,29.566 4.679,32.316
  rectangle: 5.5,29.566 6.071,32.316
  rectangle: 7.322,29.566 8.072,32.316
  rectangle: 9.143,29.566 9.643,32.316
  rectangle: 10.964,29.566 11.964,32.316
  rectangle: 12.786,29.566 13.286,32.316
  rectangle: 14.607,29.566 15.142,32.316
  rectangle: 16.429,29.566 17.679,32.316
  rectangle: 18.25,29.566 18.75,32.316
  rectangle: 56,29.566 56.5,32.316
  rectangle: 54.179,29.566 55.429,32.316
  rectangle: 52.357,29.566 52.892,32.316
  rectangle: 50.536,29.566 51.036,32.316
  rectangle: 48.714,29.566 49.714,32.316
  rectangle: 46.893,29.566 47.393,32.316
  rectangle: 45.072,29.566 45.822,32.316
  rectangle: 43.25,29.566 43.821,32.316
  rectangle: 41.429,29.566 42.429,32.316
  lines w0.254: 0.5,0.5 59.75,0.5 59.75,29.25 0.5,29.25 0.5,0.5 ; 0.5,32.75 59.75,32.75 59.75,61.5 0.5,61.5 0.5,32.75
  text "Testing Bridge" at 20.004,30.262 h1.52
Mechanical 13:
  the board outline again, w0.254

## Text inside footprints (layer, text, board x,y; h text height)
J3: Top Overlay "E1" at 8.502,15.007 h1.5 r180; Bottom Overlay "Shield" at 6.47,14.135 h1.5
J6: Top Overlay "E2" at 8.502,11.507 h1.5 r180; Bottom Overlay "Shield" at 6.47,10.635 h1.5
J12: Top Overlay "DRL" at 8.502,18.507 h1.5 r180; Bottom Overlay "Shield" at 6.47,17.635 h1.5